# EAGLE board UV_MONITOR_V2_6 (EAGLE 8.4.2)
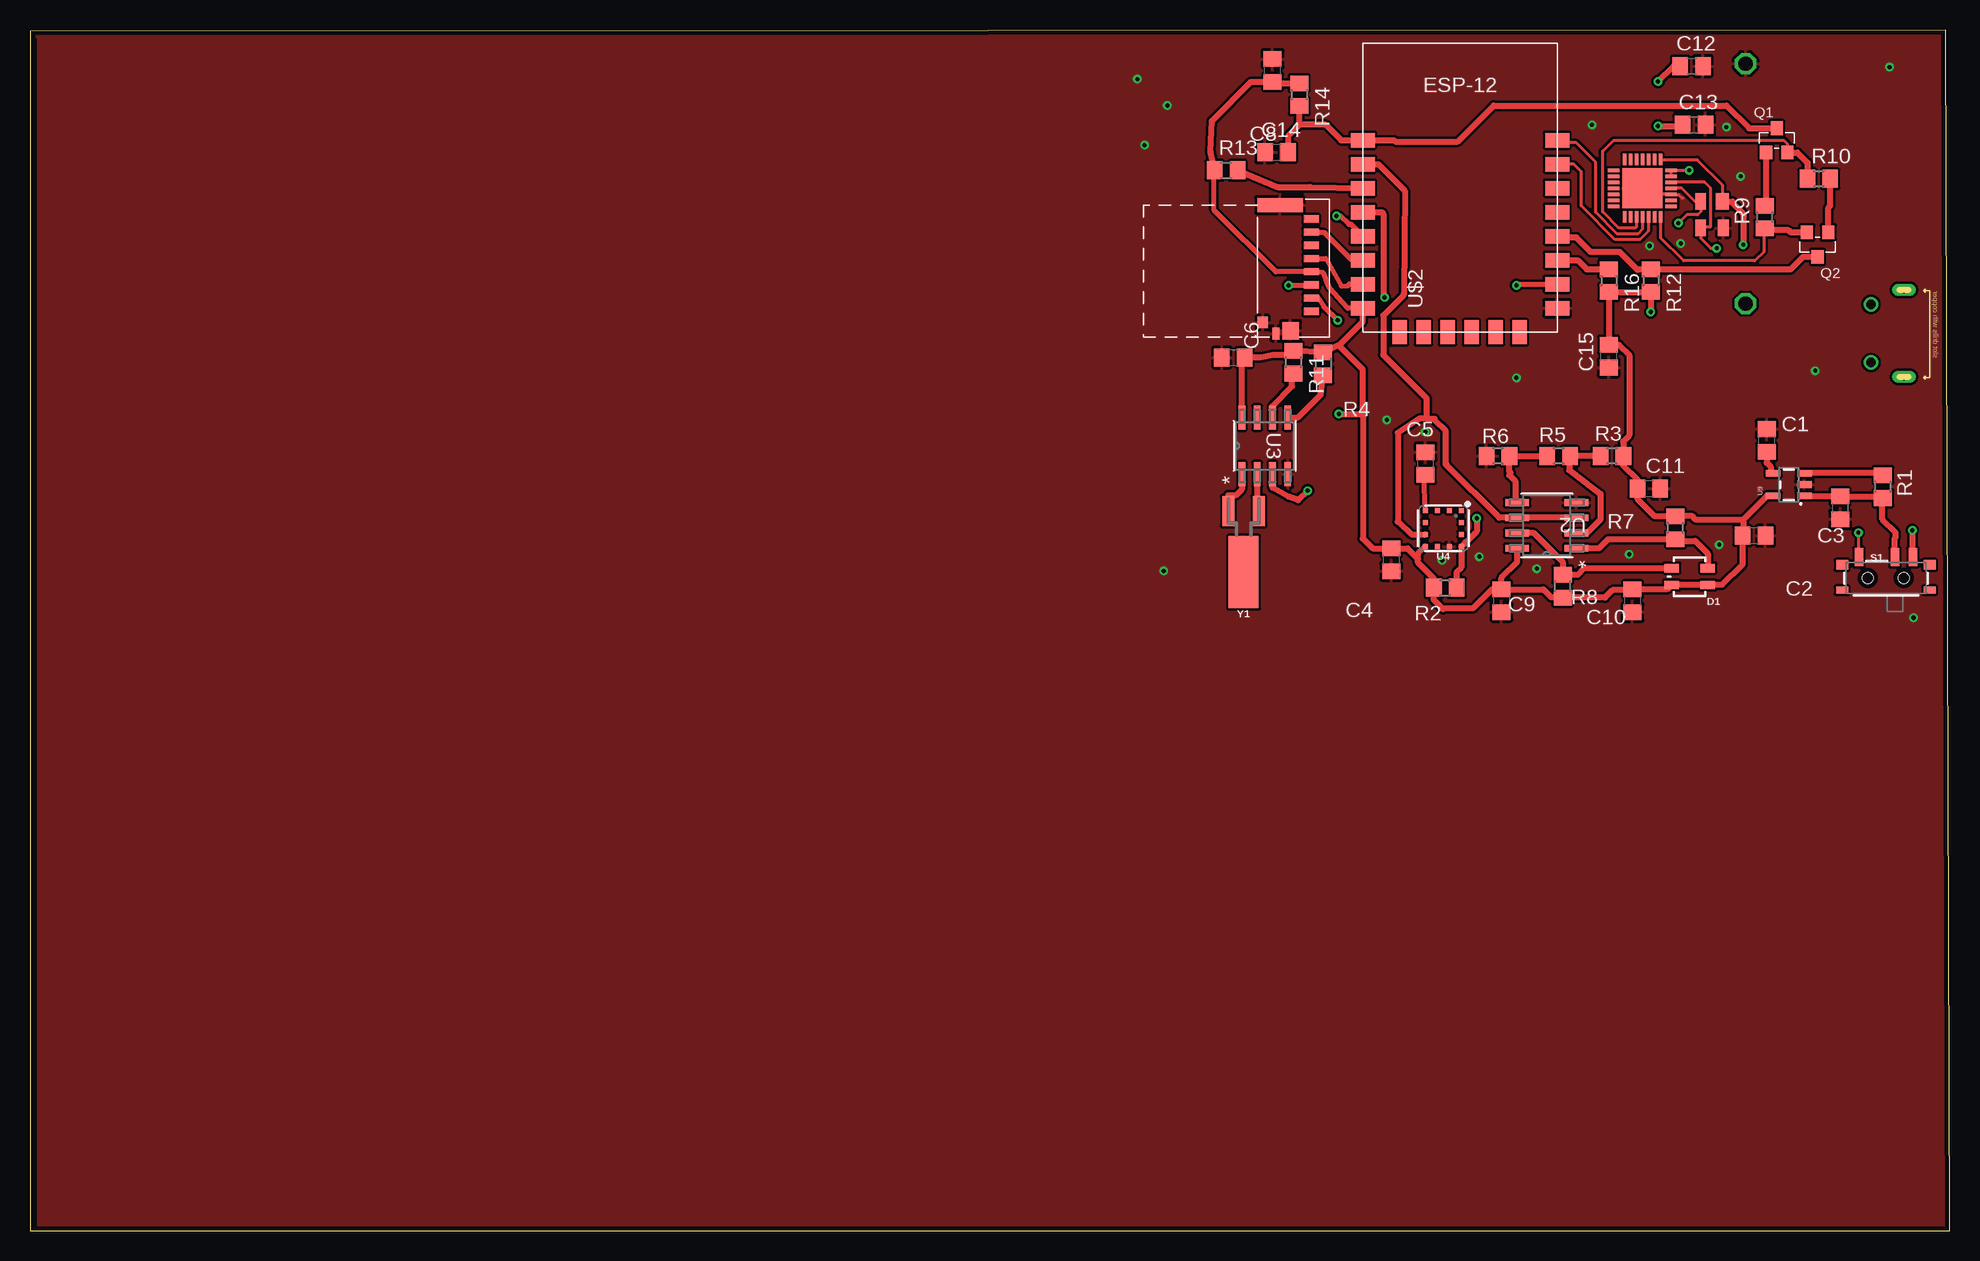
[diagram p0: board, top side]
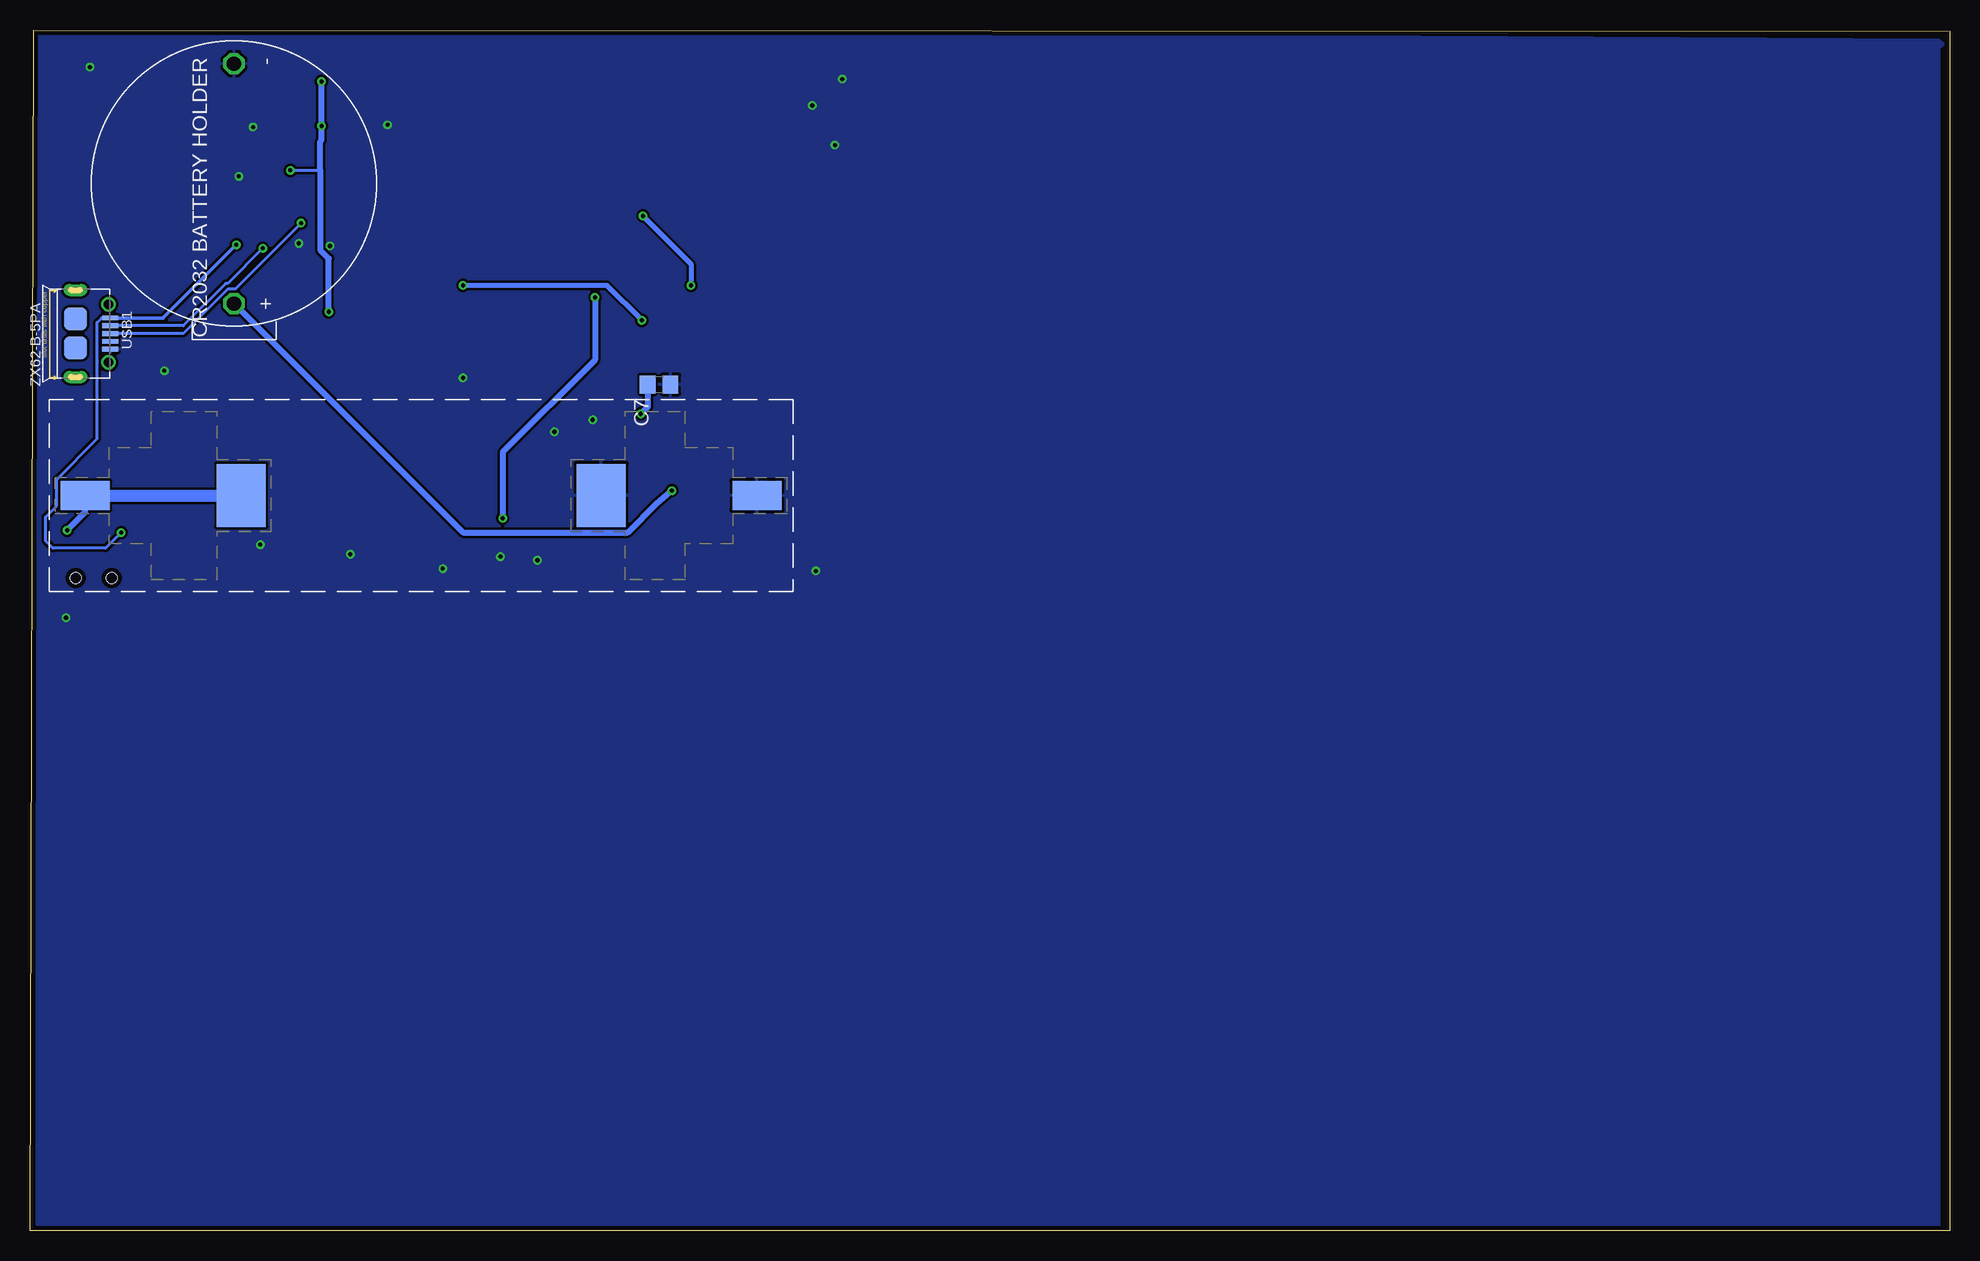
[diagram p1: board, bottom side, seen from below]

Size 160 x 100.1 mm. Coordinates in mm from the lower left corner, seen from the top.
Outline: 0,0 160,0 159.7,100.1 0,100 0,0
Copper layers (1*16): Top 0.0356mm / dielectric 1.5011mm / Bottom 0.0356mm
Design rules "osh-park-2-layers-design-rules": minimum track width 6mil, minimum drill 10mil, track to track 6mil, track to pad 6mil, pad to pad 6mil, via to via 6mil, smd to smd 6mil, copper to edge 15mil, drill to drill 6mil, minimum pad ring 7mil, minimum via ring 7mil, stop-mask expansion 3mil, vias tented up to drill 0mil, thermal gap 10mil
Net classes: 0 default: clearance 0.205 mm

## Footprints (pad centres in the part's own frame; a part is rotated, then mirrored left to right if it is on the bottom)
C0805 = smd 1.3 x 1.5: 1 -0.95,0; 2 0.95,0
LED-TRICOLOR-SMD = smd 1.2 x 0.7: A 1.5,0.7; B -1.5,0.7; G -1.5,-0.7; R 1.5,-0.7
SOT-23 = smd 1.016 x 1.143: 1 -0.889,-1.016; 2 0.889,-1.016; 3 0,1.016
R0805 = smd 1.3 x 1.5: 1 -0.95,0; 2 0.95,0
SWITCH_SPST_SMD_A = smd 0.7 x 1.5: 1 -2.25,-1.75; 2 -0.75,-1.75; 3 2.25,-1.75 | smd 1 x 0.6: GND1 -3.65,1; GND3 3.65,1 | smd 1 x 0.8: GND2 -3.65,-1.1; GND4 3.65,-1.1 | hole 0.9: -1.5,0; 1.5,0
M08A = smd 1.981 x 0.559: 1 -2.464,1.905; 2 -2.464,0.635; 3 -2.464,-0.635; 4 -2.464,-1.905; 5 2.464,-1.905; 6 2.464,-0.635; 7 2.464,0.635; 8 2.464,1.905
SOIC8-N_MC = smd 1.981 x 0.559: 1 -2.362,1.905; 2 -2.362,0.635; 3 -2.362,-0.635; 4 -2.362,-1.905; 5 2.362,-1.905; 6 2.362,-0.635; 7 2.362,0.635; 8 2.362,1.905
ML8511 = smd 0.4 x 0.4: 1 -1.5,-1.5; 2 -1.5,-0.5; 3 -1.5,0.5; 4 -1.5,1.5; 5 -0.5,1.5; 6 0.5,1.5; 7 1.5,1.5; 8 1.5,0.5; 9 1.5,-0.5; 10 1.5,-1.5; 11 0.5,-1.5; 12 -0.5,-1.5
SOT23-5 = smd 0.55 x 1.2: 1 -0.95,-1.3; 2 0,-1.3; 3 0.95,-1.3; 4 0.95,1.3; 5 -0.95,1.3
CP2102 = smd 0.95 x 0.3: CHR0 2.4,-1.5; D+ -2.4,0; D- -2.4,-0.5; DCD -2.4,1.5; GPIO0/TXT 2.4,0.5; GPIO1/RXT 2.4,0; GPIO2/RS485 2.4,-0.5; GPIO3/WAKEUP 2.4,-1; GPIO5 2.4,1.5; GPIO6 2.4,1; GRND -2.4,0.5; RI/CLK -2.4,1; VDD -2.4,-1; VREGIN -2.4,-1.5 | smd 0.3 x 0.95: CHR1 1.5,-2.4; CHREN 1,-2.4; CTS 1,2.4; DSR -1,2.4; DTR -1.5,2.4; GPIO4 1.5,2.4; NC -0.5,-2.4; RSTB -1,-2.4; RTS 0.5,2.4; RXD 0,2.4; SUSP 0.5,-2.4; SUSPB 0,-2.4; TXD -0.5,2.4; VBUS -1.5,-2.4 | smd 3.35 x 3.35: GND 0,0
ESP12F = smd 2 x 1.2: ADC 0,14; EN 0,12; GND 16.2,2; GPIO0 16.2,8; GPIO2 16.2,6; GPIO4 16.2,10; GPIO5 16.2,12; GPIO12 0,6; GPIO13 0,4; GPIO14 0,8; GPIO15 16.2,4; GPIO16 0,10; RST 0,16; RXD 16.2,14; TXD 16.2,16; VCC 0,2 | smd 1.2 x 2: CSO 3.05,0; GPIO9 7.05,0; GPIO10 9.05,0; MISO 5.05,0; MOSI 11.05,0; SCLK 13.05,0
BK-53 = smd 5.25 x 4.1: GND1 0,-15; VBAT1 0,15 | smd 2.4 x 4.1: GND2 0,-28; VBAT2 0,28
BS-7 = drill 1.17 octagon: GND -10,0; VBAT 10,0
MICRO_SD_TFR_HEADER = smd 0.6 x 1.25: 1 3.85,2; 2 2.75,2; 3 1.65,2; 4 0.55,2; 5 -0.55,2; 6 -1.65,2; 7 -2.75,2; 8 -3.85,2 | smd 1.2 x 3.8: GND1 -5,-0.6 | smd 1.45 x 1.4: GND2 5.475,0.275 | smd 1 x 0.6: GND3 5.7,-0.95 | smd 0.95 x 0.85: GND4 4.775,-2.05
SP0503BAHT = smd 0.9 x 1.35: P$1 -0.95,1.1; P$3 0.95,1.1; P$4 0.95,-1.1 | smd 1.1 x 1.35: P$2 -0.85,-1.1
MICRO-USB5+6P-SMD-0.65-AB = smd 0.4 x 1.35: 1 -1.3,2.875; 2 -0.65,2.875; 3 0,2.875; 4 0.65,2.875; 5 1.3,2.875 | smd 1.9 x 1.9: P1 -1.2,0; P2 1.2,0 | drill 0.508 pad 1.016 long: P3 -3.625,0; P4 3.625,0 | drill 0.8: P5 -2.425,2.73; P6 2.425,2.73
CRYSTAL-SMD-2X6-CYL = smd 2.5 x 6: SHEILD 0,5.08 | smd 1 x 2.5: X1 -1.27,0; X2 1.27,0

## Placement (x,y rotation side)
C1  470p  [C0805]  144.77,65.88 90 top
C2  2.2n  [C0805]  143.7,57.95 0 top
C3  2.2n  [C0805]  150.88,60.26 270 top
C4  0.1u  [C0805]  113.47,55.93 90 top
C5  1n  [C0805]  116.33,63.95 90 top
C6  2.2n  [C0805]  100.29,72.79 0 top
C7  2.2n  [C0805]  107.57,70.55 0 bottom
C8  2.2n  [C0805]  103.57,96.73 90 top
C9  2.2n  [C0805]  122.65,52.52 270 top
C10  2.2n  [C0805]  133.57,52.51 270 top
C11  2.2n  [C0805]  134.94,61.88 0 top
C12  100n  [C0805]  138.5,97.1 0 top
C13  4.7u  [C0805]  138.7,92.2 0 top
C14  470p  [C0805]  103.9,89.9 0 top
C15  2.2n  [C0805]  131.6,72.9 90 top
D1  RGB_LED  [LED-TRICOLOR-SMD]  138.34,54.53 180 top
Q1  S8050  [SOT-23]  145.6,90.9 0 top
Q2  S8050  [SOT-23]  149,82.2 180 top
R1  10k  [R0805]  154.45,62.03 90 top
R2  10k  [R0805]  117.97,53.6 0 top
R3  80k  [R0805]  131.86,64.57 180 top
R4  4.7k  [R0805]  107.79,72.27 270 top
R5  100k  [R0805]  127.41,64.57 180 top
R6  150k  [R0805]  122.36,64.57 180 top
R7  3k  [R0805]  137.15,58.6 90 top
R8  3k  [R0805]  127.75,53.73 90 top
R9  12k  [R0805]  144.6,84.5 90 top
R10  12k  [R0805]  149.1,87.7 0 top
R11  4.7k  [R0805]  105.3,72.4 270 top
R12  12k  [R0805]  135.1,79.2 270 top
R13  12k  [R0805]  99.7,88.4 0 top
R14  12k  [R0805]  105.8,94.7 270 top
R16  12k  [R0805]  131.6,79.2 270 top
S1  SPDT  [SWITCH_SPST_SMD_A]  154.7,54.4 180 top
U2  LM2903M  [M08A]  126.43,58.8 180 top
U3  MCP7940N-I/SN  [SOIC8-N_MC]  102.93,65.43 90 top
U4  ML8511 UV_SENSOR  [ML8511]  117.8,58.55 180 top
U9  MIC5219 3.3V  [SOT23-5]  146.6,62.2 90 top
U$1  CP2102  [CP2102]  134.4,86.9 180 top
U$2  ESP12F  [ESP12F]  111.1,74.9 0 top
U$3  BK-53  [BK-53]  127.4,61.3 90 bottom
U$4  BS-7  [BS-7]  143,87.3 270 bottom
U$5  MICRO_SD_TFR_HEADER  [MICRO_SD_TFR_HEADER]  104.8,80.5 270 top
U$6  SP0503BAHT  [SP0503BAHT]  140.2,84.7 180 top
USB1  ZX62-B-5PA  [MICRO-USB5+6P-SMD-0.65-AB]  156.2,74.8 270 bottom
Y1  32.768kHz  [CRYSTAL-SMD-2X6-CYL]  101.16,59.98 180 top

## Library data of the parts
C1-C15 = rcl; SPICEPREFIX: C
D1 = SparkFun-LED; PROD_ID: DIO-08324
Q1 Q2 = Seeed-Transistor; MPN: S8050
R1-R14 R16 = rcl; SPICEPREFIX: R
S1 = SparkFun-Switches; PROD_ID: SWCH-10651; SF_SKU: COM-10860
U2 = LM2903M; MANUFACTURER_PART_NUMBER: LM2903M; VENDOR: Texas Instruments
U3 = MCP7940N; MANUFACTURER_PART_NUMBER: MCP7940NISN; VENDOR: MICROCHIP
U4 = SparkFun-Sensors; PROD_ID: IC-11927
U9 = SparkFun-IC-Power; PROD_ID: VREG-09872
U$1 = CP2102
U$2 = ESP8266-ESP12F
U$3 = BK-53
U$4 = BS-7
U$5 = MicroSD TFR Header
U$6 = SP0503BAHT
USB1 = Seeed-Connector; MPN: ZX62-B-5PA
Y1 = SparkFun-Clocks; PROD_ID: XTAL-07894

## Nets
+3V3: C2.1 C4.2 C6.2 C7.1 C8.1 C9.1 C10.1 C11.1 C12.1 C13.1 C15.2 D1.A D1.B R2.1 R3.1 R4.1 R7.2 R8.1 R11.1 R12.2 R13.1 R14.1 R16.2 U2.8 U3.8 U4.7 U9.5 U$1.VDD U$1.VREGIN U$2.VCC U$5.4
BP: C1.1 U9.4
D+: U$1.D+ U$6.P$4 USB1.3
D-: U$1.D- U$6.P$3 USB1.2
EN: R1.2 U9.3
GND: C1.2 C2.2 C3.2 C4.1 C5.2 C6.1 C7.2 C8.2 C9.2 C10.2 C11.2 C12.2 C13.2 C14.1 C15.1 R6.2 U2.4 U3.4 U4.5 U9.2 U$1.GND U$1.GRND U$2.GND U$3.GND1 U$3.GND2 U$4.GND U$5.GND1 U$5.GND2 U$5.GND3 U$5.GND4 U$6.P$1 USB1.5
GREEN_LED: D1.G R7.1 U2.1
H_REF: R3.2 R5.1 U2.2
L_REF: R5.2 R6.1 U2.5
MAIN_BAT: C3.1 R1.1 S1.2 U9.1
N$1: Q1.1 R9.2
N$2: U3.2 Y1.X1
N$3: Q2.1 R10.2
N$4: R13.2 U$2.EN
N$5: U$2.GPIO12 U$5.7
N$6: U3.1 Y1.X2
N$7: U$2.GPIO15 U$5.2
N$9: U$1.RXD U$2.TXD
N$10: U$1.TXD U$2.RXD
N$11: Q2.2 R9.1 U$1.DTR
N$12: C14.2 Q1.3 R14.2 U$2.RST
N$13: Q2.3 R12.1 U$2.GPIO0
N$14: R16.1 U$2.GPIO2
N$16: U$2.GPIO13 U$5.5
N$17: U$2.GPIO14 U$5.3
RED_LED: D1.R R8.2 U2.7
RTC_SCL: R11.2 U3.6
RTC_SDA: R4.2 U3.5
RTS: Q1.2 R10.1 U$1.RTS
TR: C5.1 U4.10
UV_ADC: U2.3 U2.6 U4.8 U$2.ADC
UV_SEN_EN: R2.2 U4.4 U$2.GPIO16
VBAT: U3.3 U$4.VBAT
VBATT: S1.1 U$3.VBAT1 U$3.VBAT2
VBUS: S1.3 U$1.VBUS U$6.P$2 USB1.1

## Tracks (layer width: path | path; a pad name or v marks a point on that pad's centre or on a via)
+3V3  (via drill 0.35)
  Top 0.254: U$1.VDD U$1.VREGIN v138.3,88.4
  Top 0.406: U$2.VCC 109.85,76.9 108.33,78.62 108.03,79.32 107.79,79.86 107.19,79.96 U$5.4 103.85,79.95 98.7,85.1 98.7,88.35 R13.1
  Top 0.508: 142.8,59.3 142.8,58 C2.1 142.75,55.55 141.03,53.83 D1.B D1.A 136.47,53.46 C10.1 133.51,53.4 131.9,53.4 131.28,52.78 R8.1 127.73,52.8 126.8,52.8 126.13,53.47 C9.1 | 142.8,59.3 144.75,61.25 U9.5 | C9.1 122.65,54.45 123.97,55.77 U2.8 | C9.1 121.87,53.47 120.3,51.9 117.9,51.9 117.8,51.8 117.02,52.58 R2.1 117.02,54.38 115.7,55.7 115.7,56 | 115.7,56 115.7,56.45 U4.7 | 115.7,56 114.82,56.88 C4.2 111.92,56.88 111.1,57.7 111.1,68.1 | 142.8,59.3 138.8,59.3 138.5,59.6 137.2,59.6 R7.2 135.45,59.55 133.99,61.01 C11.1 134,62.6 132.81,63.79 R3.1 132.8,65.8 133.3,66.3 133.3,73 132.45,73.85 C15.2 R16.2 R12.2 v135.1,76.6 | U3.8 101.03,72.58 C6.2 102.59,72.79 103.6,73 105.25,73 R11.1 107.76,73.25 R4.1 109.08,73.82 109.1,73.8 | 109.1,73.8 111.1,75.8 U$2.VCC | 109.1,73.8 111.1,71.8 111.1,68.1 | R13.1 98.4,89.95 98.5,92.5 101.78,95.78 C8.1 103.7,95.65 R14.1 | v135.7,92.1 137.65,92.1 C13.1 | v135.7,95.8 137,97.1 C12.1 | v109.1,68.1 111.1,68.1
  Bottom 0.254: v138.3,88.4 135.81,88.4
  Bottom 0.508: v135.1,76.6 135.1,81.05 135.81,81.76 135.81,88.4 135.81,90.81 135.7,90.92 v135.7,92.1 v135.7,95.8 | C7.1 108.52,68.68 v109.1,68.1
BP
  Top 0.508: C1.1 144.77,64.03 145.1,63.7 145.1,63.35 U9.4
D+  (via drill 0.35)
  Top 0.254: U$1.D+ 137.7,86.9 138.8,85.8 U$6.P$4 139.25,84.95 139,84.7 138.1,84.7 v137.4,84
  Bottom 0.254: v137.4,84 142.89,78.51 143.5,78.51 147.21,74.8 USB1.3
D-  (via drill 0.35)
  Top 0.254: U$1.D- 139.6,87.4 140.1,86.9 140.1,83.7 139.35,83.7 U$6.P$3 139.25,82.75 140.1,81.9 v140.6,81.9
  Bottom 0.254: v140.6,81.9 143.53,78.97 143.69,78.97 147.21,75.45 USB1.2
EN
  Top 0.508: R1.2 154.28,63.15 U9.3
GND  (via drill 0.35)
  Top 0.254: 137.8,86.1 137.69,86.1 137.41,86.38 136.82,86.38 U$1.GRND 135.2,86.4 arc90 134.7,86.9 U$1.GND
  other vias: 148.8,71.7 92.3,96 155,97 157,51.1 94.5,55 120.8,56.2 125.6,55.2 133.3,56.4 140.8,57.2 117.7,55.9 135,82.1 92.9,90.5 137.6,82.3 113.1,67.6 123.9,71.1 94.8,93.8 116.3,66.6 141.4,92 130.2,92.2 142.6,87.9
  pour Bottom: 0.9,98.6 0.9,0.4 1,0.3 159.2,0.3 159.4,0.5 159.4,99 159.1,100.2 0.9,99.3 0.5,98.9
  pour Top: 0.7,99.5 0.7,0.2 0.5,0 159.1,0 159.8,0.7 159.8,99.4 159.6,99.6 0.5,99.6
GREEN_LED
  Top 0.508: U2.1 130.8,56.9 131.55,57.65 R7.1 137.3,57.5 138.8,57.5 139.84,56.46 D1.G
H_REF
  Top 0.508: R3.2 R5.1 128.3,64.51 128.3,63.4 130.9,61.43 130.9,59.3 129.76,58.16 U2.2
L_REF
  Top 0.508: 123.31,63.29 R6.1 R5.2 | 123.31,63.29 123.4,63.2 | 123.31,63.29 123.31,62.99 123.8,62.5 123.8,60.87 U2.5
MAIN_BAT
  Top 0.508: U9.1 150.84,61.25 C3.1 154.32,61.21 R1.1 154.4,61.03 154.4,59.3 155.5,58.2 155.5,57.8 155.45,57.75 S1.2
N$1
  Top 0.508: R9.2 144.71,85.56 Q1.1
N$2
  Top 0.508: Y1.X1 102.3,60.12 U3.2
N$3
  Top 0.508: Q2.1 149.9,85.3 150.05,85.45 R10.2
N$4
  Top 0.508: R13.2 104,87 106.7,87 U$2.EN
N$5
  Top 0.406: U$2.GPIO12 110.2,80.9 107.9,83.2 106.85,83.2 U$5.7
N$6
  Top 0.508: U3.1 101,63.04 101,61.8 100.5,61.3 99.9,61.3 99.89,61.29 Y1.X2
N$7  (via drill 0.35)
  Top 0.406: U$5.2 107.09,77.76 107.29,77.86 107.83,77.12 107.83,77.07 v109,75.9 | v123.9,78.8 124,78.9 U$2.GPIO15
  Bottom 0.406: v109,75.9 111.9,78.8 v123.9,78.8
N$9
  Top 0.254: U$1.RXD 134.4,83.5 134,83.1 132.3,83.1 130.5,84.9 130.5,89.1 128.9,90.7 127.5,90.7 U$2.TXD
N$10
  Top 0.254: U$1.TXD 134.88,84.48 134.88,83.33 134.19,82.64 132.6,82.64 | 132.6,82.64 132.3,82.64 | 132.6,82.64 132.11,82.64 129.3,85.45 129.3,88.3 128.7,88.9 U$2.RXD
N$11
  Top 0.254: 144.5,83.45 144.5,81.6 143.76,80.86 137.84,80.86 135.9,82.8 135.9,83.73 | 135.9,83.73 135.91,83.73 | U$1.DTR 135.9,83.73
  Top 0.508: Q2.2 146.78,83.22 146.6,83.4 144.75,83.4 R9.1 144.5,83.45
N$12
  Top 0.508: C14.2 104.9,89.95 104.9,91.3 105.8,92.2 | 105.8,92.2 R14.2 | 105.8,92.2 108,92.2 109.3,90.9 U$2.RST 113.7,90.9 113.8,90.8 119,90.8 122,93.8 141.4,93.8 143.3,91.9 145.58,91.9 Q1.3
N$13
  Top 0.508: U$2.GPIO0 127.4,82.8 128.9,82.8 130.1,81.6 132.5,81.6 134,80.1 134.05,80.15 R12.1 146.75,80.15 147.8,81.2 148.98,81.2 Q2.3
N$14
  Top 0.508: U$2.GPIO2 129,80.9 129.75,80.15 R16.1
N$16
  Top 0.406: U$2.GPIO13 109.9,78.9 109.9,78.8 109.3,78.75 108,81.05 | U$5.5 108,81.05 | 108,81.05 108,81
N$17  (via drill 0.35)
  Top 0.406: U$2.GPIO14 110.11,83.89 109.93,83.89 109.22,84.6 v108.9,84.6 | v104.9,78.8 104.95,78.85 U$5.3
  Bottom 0.406: v108.9,84.6 104.9,80.6 v104.9,78.8
RED_LED
  Top 0.508: U2.7 124,58.2 125.3,58.2 127.75,55.75 R8.2 127.77,54.7 129,54.7 129.53,55.23 D1.R
RTC_SCL
  Top 0.508: U3.6 103.56,68.77 105.2,70.4 105.2,71.85 R11.2
RTC_SDA
  Top 0.508: U3.5 105.69,67.79 107.59,69.69 R4.2
RTS
  Top 0.254: U$1.RTS 133.9,83.7 133.8,83.6 132.45,83.6 131.1,84.95 131.1,90 132,90.9 146.2,90.9 146.49,90.61 Q1.2
  Top 0.508: Q1.2 147.32,89.88 148.15,89.05 R10.1
TR
  Top 0.406: U4.10 116.2,62.87 C5.1
UV_ADC
  Top 0.508: U2.3 U2.6 122.47,59.44 118.1,63.8 | 118.1,63.8 118.1,63.9 | 118.1,63.8 118,63.9 118,66.7 117.1,67.6 117.1,67.7 116.4,67.7 | 116.4,67.7 115.8,67.7 114,66.5 114,59.1 115.15,58.05 U4.8 | U$2.ADC 112.4,88.9 114.6,86.7 114.5,78.1 114.5,78 112.8,76.3 112.8,73 116.4,69.4 116.4,67.7
UV_SEN_EN  (via drill 0.35)
  Top 0.508: R2.2 118.9,53.62 118.9,54.9 119.3,55.3 U4.4 119.64,57.39 119.69,57.39 120.6,58.3 v120.6,59.4 | U$2.GPIO16 112.7,84.9 112.8,84.8 112.8,77.9 v112.9,77.8
  Bottom 0.508: v112.9,77.8 112.9,72.6 120.6,64.9 v120.6,59.4
VBAT  (via drill 0.35)
  Top 0.508: v106.5,61.7 105.7,60.9 104.9,61.2 103.56,61.94 U3.3
  Bottom 0.508: U$4.VBAT 123.92,58.22 110.16,58.22 107.78,60.6 106.6,61.6 106.6,61.7 v106.5,61.7
VBATT  (via drill 0.35)
  Top 0.508: S1.1 156.95,58.35 v156.9,58.4
  Bottom 0.508: v156.9,58.4 155.4,59.9 U$3.VBAT2
  Bottom 1.016: U$3.VBAT2 U$3.VBAT1
VBUS  (via drill 0.35)
  Top 0.254: U$1.VBUS 138.95,89.3 141.05,87.2 U$6.P$2 | S1.3 152.45,58.15 v152.4,58.2
  Top 0.508: U$6.P$2 141.9,85.8 141.9,85.7 142.8,84.8 v142.8,82.2
  Bottom 0.254: v152.4,58.2 153.7,56.9 158.1,56.9 158.7,57.5 158.7,59.5 157.78,60.42 157.78,62.64 154.4,66.02 154.4,75.72 154.04,76.08 153.64,76.08 USB1.1
  Bottom 0.305: v142.8,82.2 148.89,76.11 148.9,76.1 USB1.1